# Altium PCB ControllerIntermediatePCB.PcbDoc
Units mil, origin at the board's own origin, x right, y up, seen from the top; angles counter-clockwise.
Board outline 1805 x 4035 mil, 2 copper layers (Top Layer, Bottom Layer); 4 components, 18 nets, 140 pads, 6 vias.
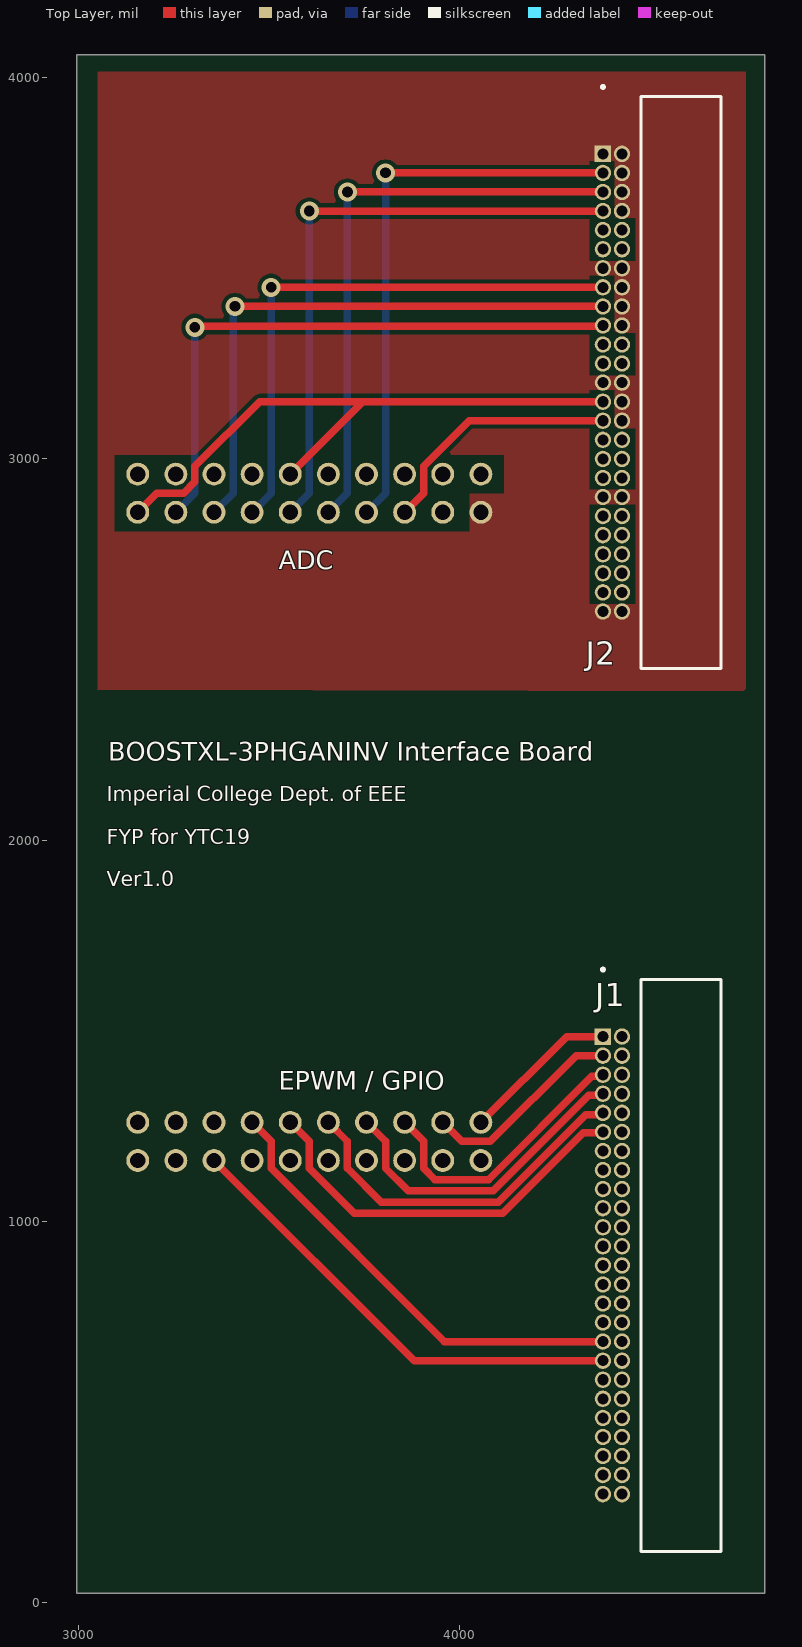
[diagram p0: Top Layer view]
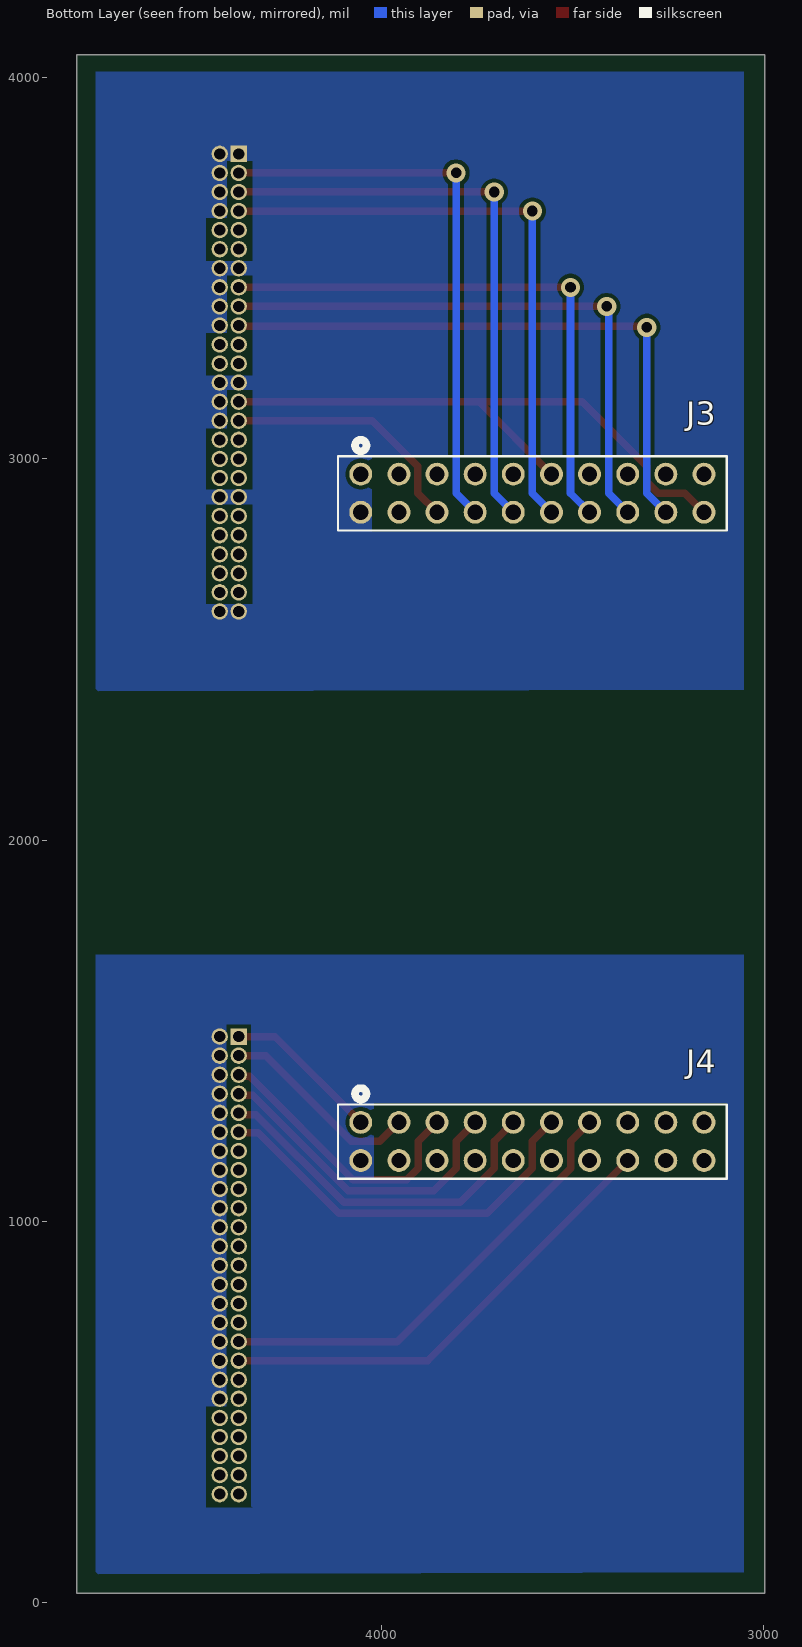
[diagram p1: Bottom Layer view, seen from below]

## Layer stack, top to bottom
Top Solder: solder mask 0.4, Solder Resist, Dk 3.5
Top Layer: signal copper 1.4
Dielectric 1: dielectric 12.6, FR-4, Dk 4.8
Bottom Layer: signal copper 1.4
Bottom Solder: solder mask 0.4, Solder Resist, Dk 3.5

## Board outline
2995,25 4800,25 4800,4060 2995,4060

## Design rules (kind name [scope] priority, off if disabled: settings)
Clearance [All] p1: gap=10 ignorepadtopadclearanceinfootprint=FALSE except(0: Arc-Hole Track-Hole SMDPad-Hole THPad-Hole Via-Hole Fill-Hole Poly-Hole Region-Hole Text-Hole; 5.91: SMDPad-SMDPad THPad-THPad)
PolygonConnect [All] p1: connectstyle=Direct reliefconductorwidth=10 reliefentries=4 polygonreliefangle="90 Angle" airgapwidth=10
RoutingVias [All] p1: holewidth=28 width=50 viastyle="Through Hole" minholewidth=28 minwidth=50 maxholewidth=28 maxwidth=50
SolderMaskExpansion [All] p1: expansion=4 istentingtop=FALSE
Width [All] p1: maxlimit=39.37 minlimit=10 preferedwidth=19.68
30 further rules are at their usual default settings.

## Components (designator, comment, footprint, x,y, rotation, side; value= is the part's Value field where it differs from the comment)
J1 "SHF-125-01-L-D-RA" SAMTEC_SHF-125-01-L-D-RA 4400,885 r270 top
J2 "SHF-125-01-L-D-RA" SAMTEC_SHF-125-01-L-D-RA 4400,3200 r270 top
J3 "SSW-110-01-T-D" SAMTEC_SSW-110-01-T-D 3155,2860 r0 bottom
J4 "SSW-110-01-T-D" SAMTEC_SSW-110-01-T-D 3155,1160 r0 bottom

## Footprints (in the part's own frame and the unit in brackets; to place one, negate y for a bottom-side part, rotate by r counter-clockwise, add the part's x,y. Pads: shape width x height; smd on the part's side, far side on the other; paste and mask are expansions set on the pad)
SAMTEC_SHF-125-01-L-D-RA [mm]
  rect 1.09x1.09 hole 0.74 mask+0.381: 01(-15.24,-0.635)
  round 1.09 hole 0.74 mask+0.381: 02(-15.24,0.635) 03(-13.97,-0.635) 04(-13.97,0.635) 05(-12.7,-0.635) 06(-12.7,0.635) 07(-11.43,-0.635) 08(-11.43,0.635) 09(-10.16,-0.635) 10(-10.16,0.635) 11(-8.89,-0.635) 12(-8.89,0.635) 13(-7.62,-0.635) 14(-7.62,0.635) 15(-6.35,-0.635) 16(-6.35,0.635) 17(-5.08,-0.635) 18(-5.08,0.635) 19(-3.81,-0.635) 20(-3.81,0.635) 21(-2.54,-0.635) 22(-2.54,0.635) 23(-1.27,-0.635) 24(-1.27,0.635) 25(0,-0.635) 26(0,0.635) 27(1.27,-0.635) 28(1.27,0.635) 29(2.54,-0.635) 30(2.54,0.635) 31(3.81,-0.635) 32(3.81,0.635) 33(5.08,-0.635) 34(5.08,0.635) 35(6.35,-0.635) 36(6.35,0.635) 37(7.62,-0.635) 38(7.62,0.635) 39(8.89,-0.635) 40(8.89,0.635) 41(10.16,-0.635) 42(10.16,0.635) 43(11.43,-0.635) 44(11.43,0.635) 45(12.7,-0.635) 46(12.7,0.635) 47(13.97,-0.635) 48(13.97,0.635) 49(15.24,-0.635) 50(15.24,0.635)
  silkscreen extent -19.8,-0.73 19.05,7.23, body extent -19.05,-0.84 19.05,7.24, height 5.59
SAMTEC_SSW-110-01-T-D [mil]
  round 60 hole 40: 1(900,-100) 2(900,0) 3(800,-100) 4(800,0) 5(700,-100) 6(700,0) 7(600,-100) 8(600,0) 9(500,-100) 10(500,0) 11(400,-100) 12(400,0) 13(300,-100) 14(300,0) 15(200,-100) 16(200,0) 17(100,-100) 18(100,0) 19(0,-100) 20(0,0)
  silkscreen extent -60,-190 960,48, body extent -60,-145 960,50, height 335

## Part data
J1 J2: Package=None, Availability=Unavailable, MF=Samtec, MP=SHF-125-01-L-D-RA, Price=None
J3 J4: "Connector", Manufacturer_Name=SAMTEC, Mouser Part Number=200-SSW11001TD, Arrow Part Number=SSW-110-01-T-D, Arrow Price/Stock=https://www.arrow.com/en/products/ssw-110-01-t-d/samtec?region=nac, Datasheet Link=http://suddendocs.samtec.com/prints/ssw-1xx-xx-xxx-x-xx-xxx-xx-mkt.pdf, Manufacturer_Part_Number=SSW-110-01-T-D, Mouser Price/Stock=https://www.mouser.co.uk/ProductDetail/Samtec/SSW-110-01-T-D?qs=rkdpAy2aP%2F9uJOQW5acCOw%3D%3D

## Via types
v1: diameter 50, hole 28, Top Layer to Bottom Layer, 6 vias

## Nets (pads, with @x,y where several pads share a name; then routed paths per layer and width w, separated by ;. In a path a pad name is that pad's centre, name@x,y a point inside that pad or via, vN(x,y) a via of type N, cw(c..) or ccw(c..) an arc to the next point about the centre after c; other vN are vias at no path point)
AGND: J2.01 J2.02 J2.04 J2.06 J2.08 J2.13 J2.14 J2.16 J2.18 J2.20 J2.25 J2.26 J2.28 J2.30 J2.37 J2.38 J2.49 J2.50 J3.2
EPWM1A: J1.01 J4.1 | length 413.2
  Top Layer w19.68: J4.1 4280,1485 J1.01
EPWM1B: J1.03 J4.3 | length 533.8
  Top Layer w19.68: J4.3 4004.84,1210.16 4079.81,1210.16 4304.65,1435 J1.03
EPWM2A: J1.05 J4.5 | length 737.2
  Top Layer w19.68: J4.5 3904.84,1210.16 3904.84,1139.67 3934.35,1110.16 4075.65,1110.16 4346.04,1380.56 4370.56,1380.56 J1.05
EPWM2B: J1.07 J4.7 | length 841.1
  Top Layer w19.68: J4.7 3804.84,1210.16 3804.84,1139.67 3864.04,1080.47 4087.94,1080.47 4338.02,1330.56 4370.56,1330.56 J1.07
EPWM3A: J1.09 J4.9 | length 945
  Top Layer w19.68: J4.9 3705.16,1209.84 3705.16,1139.35 3793.72,1050.79 4100.24,1050.79 4330.01,1280.56 4370.56,1280.56 J1.09
EPWM3B: J1.11 J4.11 | length 1048.8
  Top Layer w19.68: J4.11 3604.84,1210.16 3604.84,1139.67 3723.41,1021.1 4112.53,1021.1 4324.02,1232.59 4372.59,1232.59 J1.11
GND: J1.02 J1.04 J1.06 J1.08 J1.10 J1.12 J1.14 J1.16 J1.18 J1.20 J1.22 J1.24 J1.26 J1.28 J1.30 J1.32 J1.34 J1.36 J1.38 J1.40 J4.2
IA: J2.15 J3.14 | length 1480.7
  Top Layer w19.68: v1(3505,3450) J2.15
  Bottom Layer w19.68: J3.14 3505,2910 v1(3505,3450)
IB: J2.17 J3.16 | length 1527.8
  Top Layer w19.68: v1(3410,3400) J2.17
  Bottom Layer w19.68: J3.16 3405.16,2910.16 3405.16,3395.16 v1(3410,3400)
IC: J2.19 J3.18 | length 1577.8
  Top Layer w19.68: v1(3305,3345) 3307.5,3347.5 4372.5,3347.5 J2.19
  Bottom Layer w19.68: J3.18 3305,2910 v1(3305,3345)
PCB_OT: J1.33 J4.13 | length 1199.5
  Top Layer w19.68: J4.13 3504.84,1210.16 3504.84,1139.67 3959.51,685 J1.33
PWM_EN: J1.35 J4.16 | length 1237.5
  Top Layer w19.68: J4.16 3880,635 J1.35
VA: J2.03 J3.8 | length 1480.7
  Top Layer w19.68: v1(3805,3750) J2.03
  Bottom Layer w19.68: J3.8 3805,2910 v1(3805,3750)
VB: J2.05 J3.10 | length 1530.7
  Top Layer w19.68: v1(3705,3700) J2.05
  Bottom Layer w19.68: J3.10 3705,2910 v1(3705,3700)
VC: J2.07 J3.12 | length 1580.7
  Top Layer w19.68: v1(3605,3650) J2.07
  Bottom Layer w19.68: J3.12 3605,2910 v1(3605,3650)
VDC: J2.29 J3.6 | length 660.7
  Top Layer w19.68: J3.6 3905.16,2910.16 3905.16,2980.65 4024.51,3100 J2.29
VREF: J2.27 J3.11 J3.20 | length 1632.8
  Top Layer w19.68: J3.20 3204.84,2909.84 3275.33,2909.84 3305.16,2939.67 3305.16,2980.65 3474.51,3150 3745,3150 ; J3.11 3745,3150 ; J2.27 3745,3150
pads on no net: J1.13 J1.15 J1.17 J1.19 J1.21 J1.23 J1.25 J1.27 J1.29 J1.31 J1.37 J1.39 J1.41 J1.42 J1.43 J1.44 J1.45 J1.46 J1.47 J1.48 J1.49 J1.50 J2.09 J2.10 J2.11 J2.12 J2.21 J2.22 J2.23 J2.24 J2.31 J2.32 J2.33 J2.34 J2.35 J2.36 J2.39 J2.40 J2.41 J2.42 J2.43 J2.44 J2.45 J2.46 J2.47 J2.48 J3.1 J3.3 J3.4 J3.5 J3.7 J3.9 J3.13 J3.15 J3.17 J3.19 J4.4 J4.6 J4.8 J4.10 J4.12 J4.14 J4.15 J4.17 J4.18 J4.19 J4.20

## Polygon pours and split planes (outlines as drawn)
AGND on Bottom Layer "AGND_L02_P005" (solid, remove dead copper, pour order 5): 4750,2390 4750,4015 3050,4015 3050,2395
GND on Bottom Layer "GND_L02_P004" (solid, remove dead copper, pour order 4): 4750,75 4750,1700 3050,1700 3050,80
AGND on Bottom Layer "AGND_L02_P002" (solid, remove dead copper, pour order 2): 4520,3960 4265,3960 4265,2440 4520,2440
GND on Bottom Layer "GND_L02_P000" (solid, pour order 0): 4520,1645 4265,1645 4265,125 4520,125
AGND on Top Layer "AGND_L01_P006" (solid, remove dead copper, pour order 6): 4750,2390 4750,4015 3050,4015 3050,2395

## Other copper
Top Layer:
  pour cut-out: 4115,3010 4115,2910 4025,2910 4025,2810 3095,2810 3095,3010
  pour cut-out: 4340,3780 4405,3780 4405,3631.46 4460,3631.46 4460,3520 4340,3520
  pour cut-out: 4340,3480 4405,3480 4405,3329.31 4460,3329.31 4460,3220 4340,3220
  pour cut-out: 4340,3180 4405,3180 4405,3079.31 4460,3079.31 4460,2920 4340,2920
  pour cut-out: 4460,2880 4460,2620 4340,2620 4340,2880
  pour cut-out: 4406.46,514.31 4460,514.31 4460,250 4340,250 4343.54,253.54 4343.54,1516.46 4406.46,1516.46 4343.54,1516.46 4406.46,1516.46
Bottom Layer:
  pour cut-out: 3095,3010 4025,3010 4025,2810 3095,2810
  pour cut-out: 3095,1310 4020,1310 4020,1110 3095,1110
  pour cut-out: 4340,3780 4405,3780 4405,3631.46 4460,3631.46 4460,3520 4340,3520
  pour cut-out: 4340,3480 4405,3480 4405,3329.31 4460,3329.31 4460,3220 4340,3220
  pour cut-out: 4340,3180 4405,3180 4405,3079.31 4460,3079.31 4460,2920 4340,2920
  pour cut-out: 4460,2880 4460,2620 4340,2620 4340,2880
  pour cut-out: 4406.46,514.31 4460,514.31 4460,250 4340,250 4343.54,253.54 4343.54,1516.46 4406.46,1516.46 4343.54,1516.46 4406.46,1516.46
  pour cut-out: 4406.46,514.31 4460,514.31 4460,250 4340,250 4343.54,253.54 4343.54,1516.46 4406.46,1516.46 4343.54,1516.46 4406.46,1516.46

## Silkscreen, mask and mechanical layers (free items; w line width, h text height)
Top Overlay:
  text "ADC" at 3525,2710 h49.21
  text "BOOSTXL-3PHGANINV Interface Board" at 3077.87,2207.87 h49.21
  text "Imperial College Dept. of EEE" at 3073.94,2102.06 h39.37
  text "FYP for YTC19" at 3073.94,1988.94 h39.37
  text "Ver1.0" at 3073.94,1878.94 h39.37
  text "EPWM / GPIO" at 3525,1345 h49.21
Mechanical 1:
  the board outline again, w47.24